# Allegro board HY_TPL5010_V10.brd
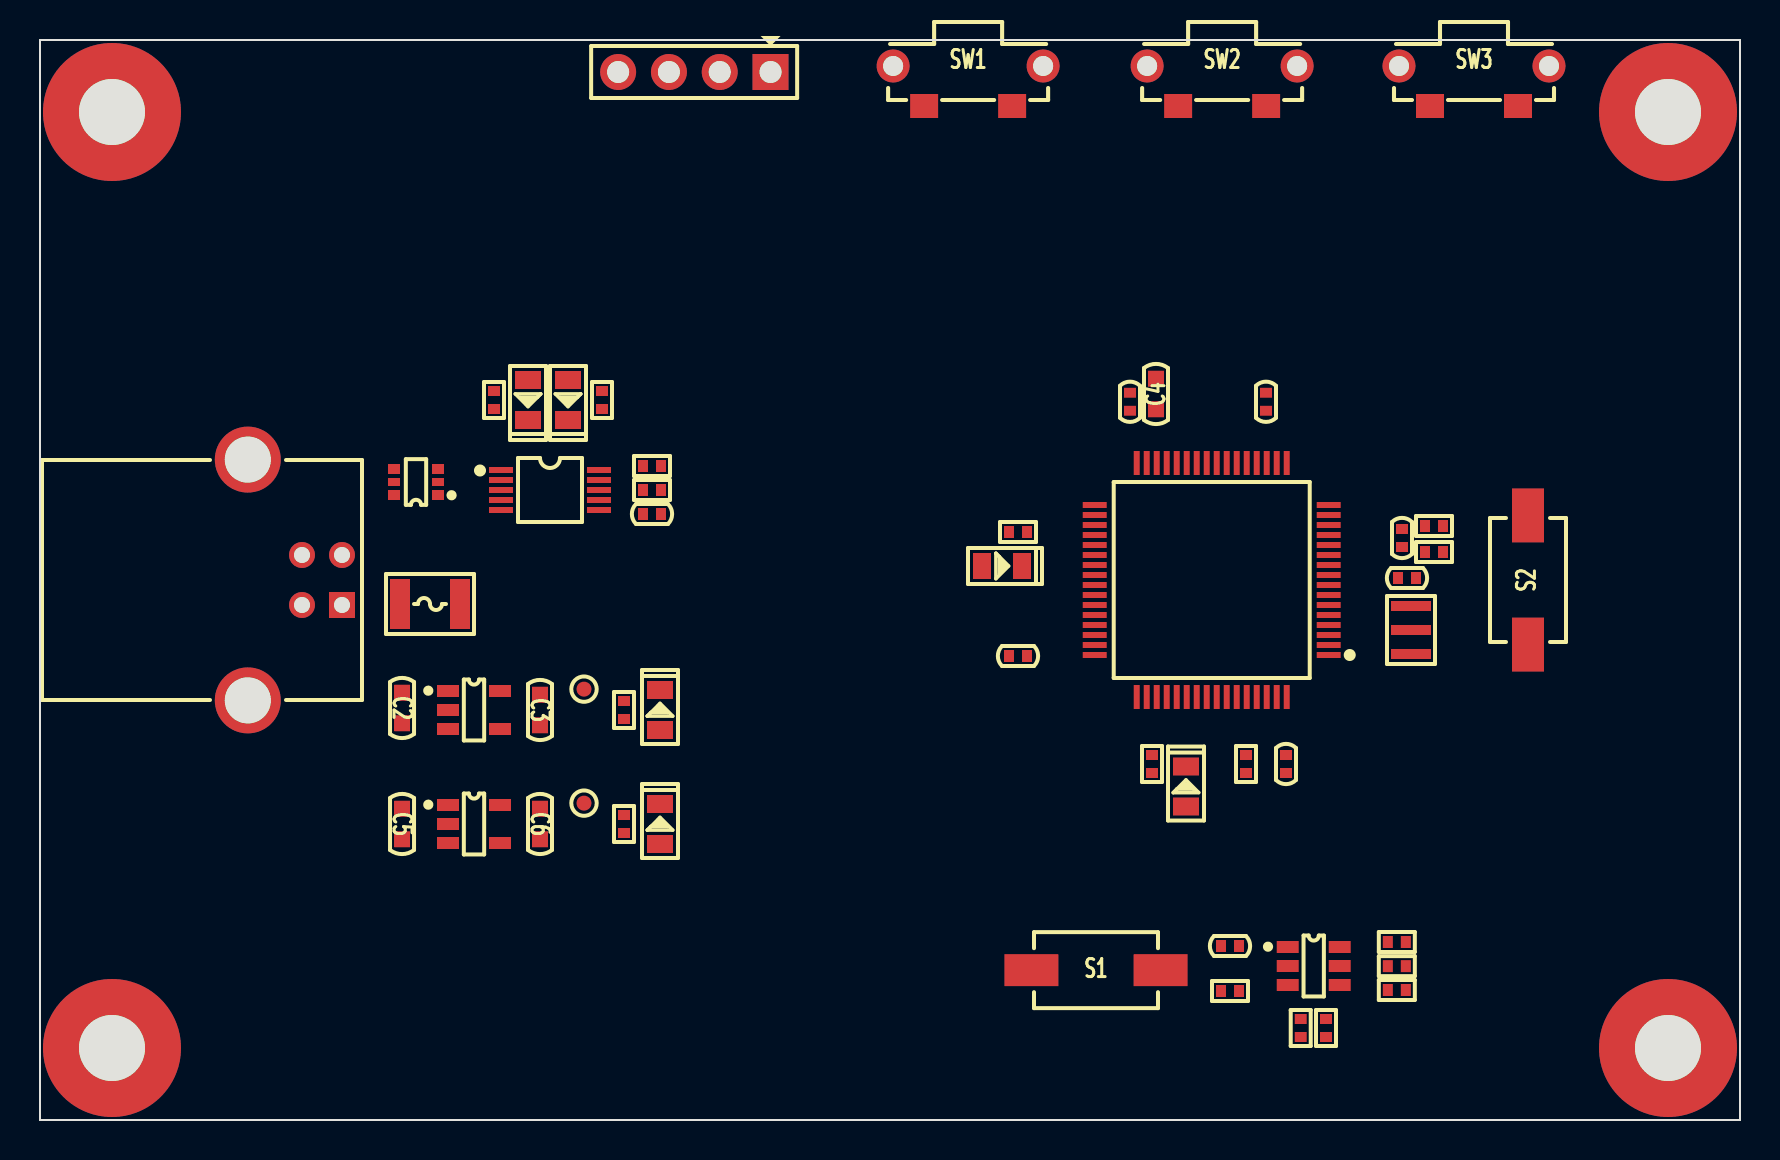
[diagram p0: board, top side]
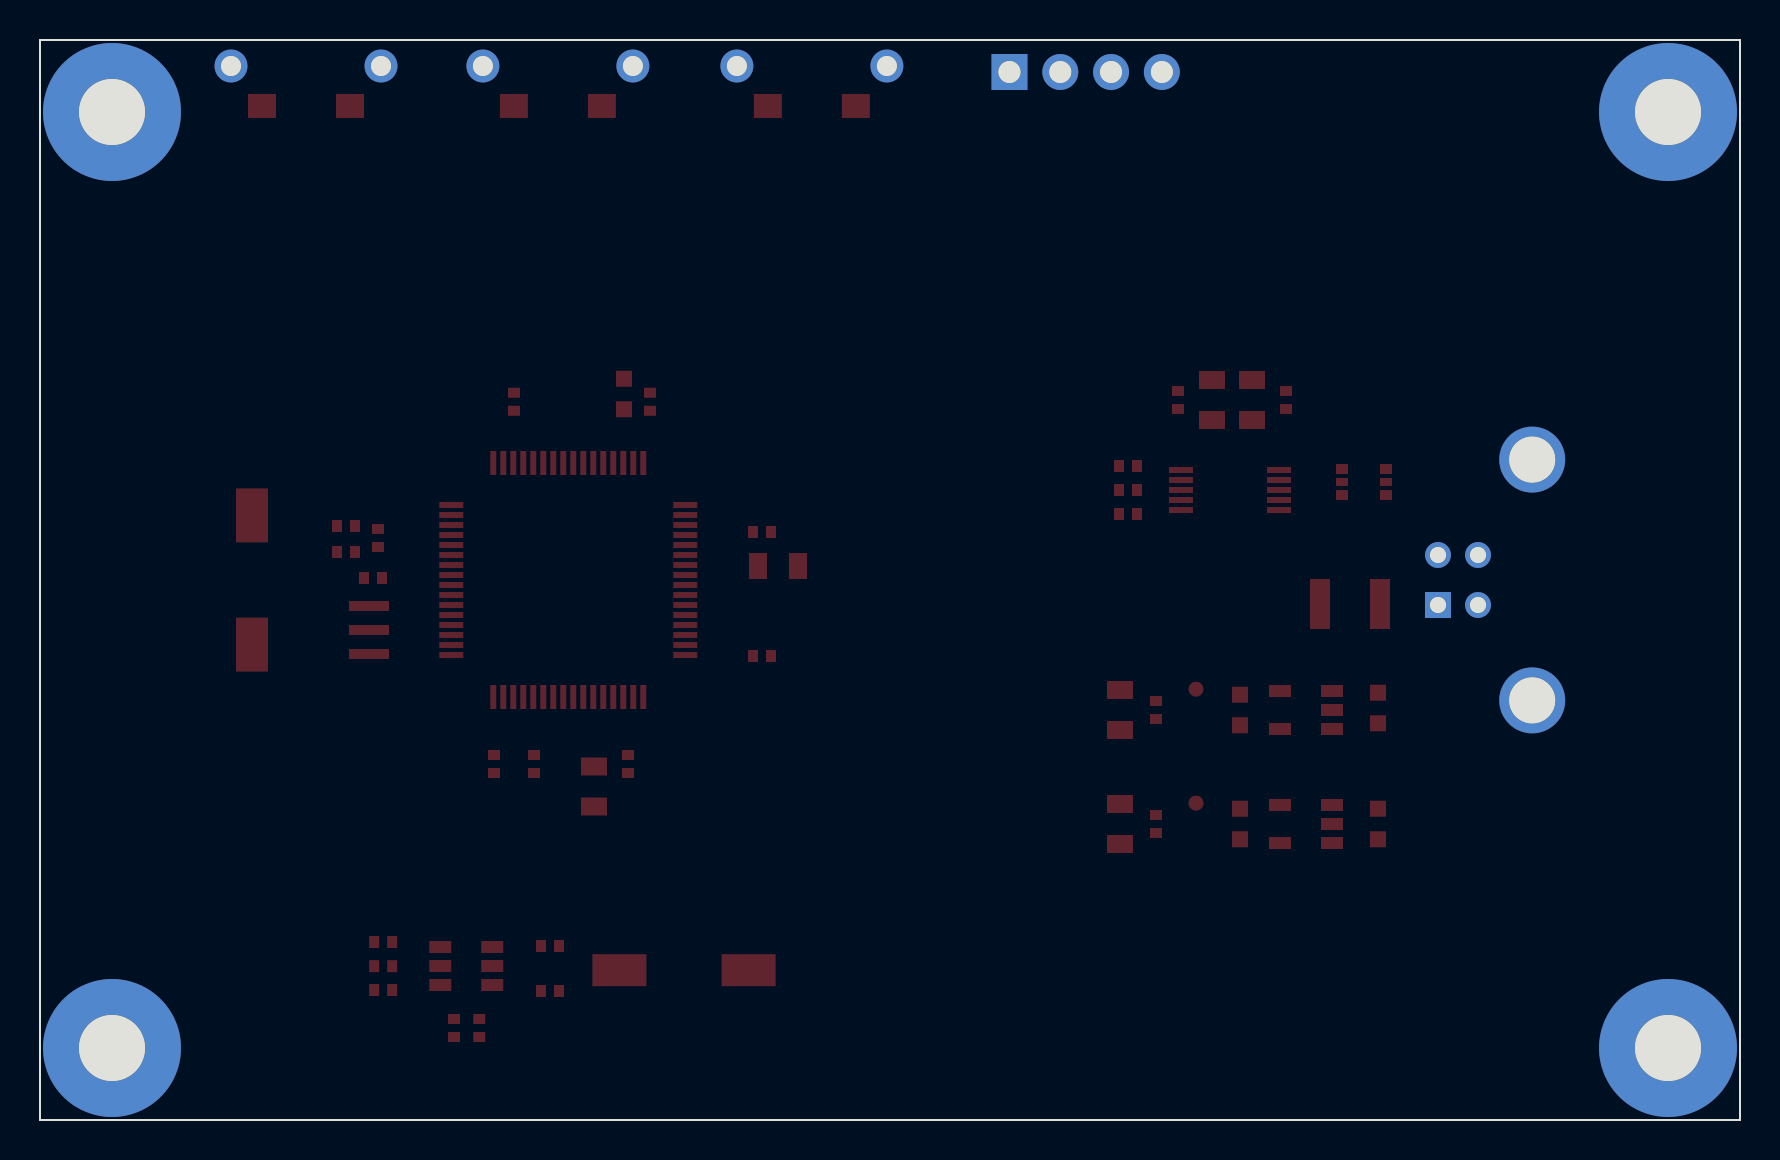
[diagram p1: board, bottom side, seen from below]

Outline 85 x 54 mm; copper layers: TOP, BOTTOM. Coordinates in mm from the lower left corner of the outline.
Outline path: 0,54 0,0 85,0 85,54 0,54

## Design rules (mm)
constraint set DEFAULT: min track width 0.203, pair gap 0.203
net group USB_D: nets USB_DM USB_DP

## Placement (name value [footprint] x y rotation side)
C1  100nF_50V  [C0402]  30.6 30.3 180 top
C2  10uF_10V  [C0603]  18.1 20.6 270 top
C3  10uF_10V  [C0603]  25 20.5 270 top
C4  10uF_10V  [C0603]  55.8 36.3 90 top
C5  10uF_10V  [C0603]  18.1 14.8 270 top
C6  10uF_10V  [C0603]  25 14.8 270 top
C7  100nF_50V  [C0402]  54.5 35.91 270 top
C8  100nF_50V  [C0402]  61.3 35.91 270 top
C9  100nF_50V  [C0402]  48.9 23.2 0 top
C10  100nF_50V  [C0402]  62.3 17.8 90 top
C11  100nF_50V  [C0402]  59.5 8.7 180 top
C12  100nF_50V  [C0402]  68.1 29.1 90 top
C13  100nF_50V  [C0402]  68.35 27.1 0 top
D1  RED_0805  [LED0805]  24.4 36 270 top
D2  RED_0805  [LED0805]  26.4 36 270 top
D3  RED_0805  [LED0805]  31 20.5 90 top
D4  RED_0805  [LED0805]  31 14.8 90 top
D5  RED_0805  [LED0805]  48.1 27.7 0 top
D6  RED_0805  [LED0805]  57.3 16.67 90 top
F1  SMD1210-200  [FUSE1210]  19.5 25.8 0 top
J1  -  [CN1X4-2P54-Z]  36.53 52.4 180 top
MH1  Hold/NI  [HOLD6R90X3R40]  3.6 3.6 0 top
MH2  Hold/NI  [HOLD6R90X3R40]  81.4 3.6 0 top
MH3  Hold/NI  [HOLD6R90X3R40]  81.4 50.4 0 top
MH4  Hold/NI  [HOLD6R90X3R40]  3.6 50.4 0 top
R1  4.7K  [R0402]  22.7 36 90 top
R2  4.7K  [R0402]  28.1 36 90 top
R3  1K  [R0402]  30.6 32.7 0 top
R4  1K  [R0402]  30.6 31.5 0 top
R5  4.7K  [R0402]  29.2 20.5 270 top
R6  4.7K  [R0402]  29.2 14.8 270 top
R7  0R  [R0402]  69.7 29.7 0 top
R8  100K  [R0402]  67.84 8.9 0 top
R9  1K  [R0402]  67.84 7.69 0 top
R10  0R  [R0402]  69.7 28.4 0 top
R11  100K  [R0402]  63.04 4.6 270 top
R12  100K  [R0402]  64.3 4.6 270 top
R13  22K  [R0402]  59.5 6.45 0 top
R14  1K  [R0402]  67.84 6.5 0 top
R15  10K  [R0402]  48.9 29.4 180 top
R16  10K  [R0402]  60.3 17.8 270 top
R17  10K  [R0402]  55.6 17.8 270 top
S1  3*6*2.5  [KEY-2P-SMD-6R2X3R8X2R5]  52.8 7.49 0 top
S2  3*6*2.5  [KEY-2P-SMD-6R2X3R8X2R5]  74.4 27 90 top
SW1  -  [K2-1112SW-A4SW-04]  46.41 52.4 0 top
SW2  -  [K2-1112SW-A4SW-04]  59.11 52.4 0 top
SW3  -  [K2-1112SW-A4SW-04]  71.7 52.4 0 top
TP1  TestPoint/NI  [TP-0R75]  27.2 21.54 0 top
TP2  TestPoint/NI  [TP-0R75]  27.2 15.84 0 top
U1  CH340E  [MSOP10]  25.5 31.5 270 top
U2  STM32F410RBT6  [LQFP64-10X10X0R5]  58.59 27 90 top
U3  TPD4E1U06DCKR  [SOT363]  18.8 31.9 90 top
U4  SPX3819M5-L-3-3/TR  [SOT23-5]  21.7 20.5 270 top
U5  SPX3819M5-L-3-3/TR  [SOT23-5]  21.7 14.8 270 top
U6  TPL5010DDCR  [SOT23-6]  63.69 7.7 270 top
USB1  -  [USB-B]  15.1 27 180 top
X1  CSTCE8M00G15C99-R0  [X-3P-3R2X1R3-SMD]  68.55 24.5 90 top

## Library data of the parts
C1-C12 = CAP NP_2
C13 = CAP NP
D1-D4 = LED_1
D5 D6 = LED_4
F1 = FUSE
J1 = CONN RCPT 4
MH1-MH4 = Hold_1
R1-R17 = R_Generic
S1 S2 = SW PUSHBUTTON_0
SW1-SW3 = SWITCH-SPST-4P
TP1 TP2 = TestPoint
U1 = CH340E
U2 = STM32F410RBT6
U3 = TPD4E1U06DBVR
U4 U5 = SPX3819M5-L-1-2
U6 = TPL5010DDCR
USB1 = USB-B
X1 = XTAL_5032_0

## Footprints (pads in the part's own frame, mm; a bottom-side part is the same pattern mirrored in y, then rotated)
C0402
  rect 0.5x0.6 smd: 1(-0.45,0) 2(0.45,0)
C0603
  rect 0.8x0.8 smd: 1(-0.762,0) 2(0.762,0)
CN1X4-2P54-Z
  rect 1.8x1.8 hole 1.1: 1(0,0)
  round 1.8 hole 1.1: 2(2.54,0) 3(5.08,0) 4(7.62,0)
FUSE1210
  rect 1x2.5 smd: 1(-1.5,0) 2(1.5,0)
HOLD6R90X3R40
  round 6.9 hole 3.3: 1(0,0)
K2-1112SW-A4SW-04
  round 1.65 hole 1: 1(-3.75,0.3) 4(3.75,0.3)
  rect 1.4x1.2 smd: 2(-2.2,-1.7) 3(2.2,-1.7)
KEY-2P-SMD-6R2X3R8X2R5
  rect 2.7x1.6 smd: 1(-3.23,0) 2(3.23,0)
LED0805
  rect 0.9x1.3 smd: 1(-1,0) 2(1,0)
LQFP64-10X10X0R5
  rect 0.3x1.2 smd: 1(-3.75,-5.85) 2(-3.25,-5.85) 3(-2.75,-5.85) 4(-2.25,-5.85) 5(-1.75,-5.85) 6(-1.25,-5.85) 7(-0.75,-5.85) 8(-0.25,-5.85) 9(0.25,-5.85) 10(0.75,-5.85) 11(1.25,-5.85) 12(1.75,-5.85) 13(2.25,-5.85) 14(2.75,-5.85) 15(3.25,-5.85) 16(3.75,-5.85) 33(3.75,5.85) 34(3.25,5.85) 35(2.75,5.85) 36(2.25,5.85) 37(1.75,5.85) 38(1.25,5.85) 39(0.75,5.85) 40(0.25,5.85) 41(-0.25,5.85) 42(-0.75,5.85) 43(-1.25,5.85) 44(-1.75,5.85) 45(-2.25,5.85) 46(-2.75,5.85) 47(-3.25,5.85) 48(-3.75,5.85)
  rect 1.2x0.3 smd: 17(5.85,-3.75) 18(5.85,-3.25) 19(5.85,-2.75) 20(5.85,-2.25) 21(5.85,-1.75) 22(5.85,-1.25) 23(5.85,-0.75) 24(5.85,-0.25) 25(5.85,0.25) 26(5.85,0.75) 27(5.85,1.25) 28(5.85,1.75) 29(5.85,2.25) 30(5.85,2.75) 31(5.85,3.25) 32(5.85,3.75) 49(-5.85,3.75) 50(-5.85,3.25) 51(-5.85,2.75) 52(-5.85,2.25) 53(-5.85,1.75) 54(-5.85,1.25) 55(-5.85,0.75) 56(-5.85,0.25) 57(-5.85,-0.25) 58(-5.85,-0.75) 59(-5.85,-1.25) 60(-5.85,-1.75) 61(-5.85,-2.25) 62(-5.85,-2.75) 63(-5.85,-3.25) 64(-5.85,-3.75)
MSOP10
  rect 0.3x1.2 smd: 1(-1,-2.45) 2(-0.5,-2.45) 3(0,-2.45) 4(0.5,-2.45) 5(1,-2.45) 6(1,2.45) 7(0.5,2.45) 8(0,2.45) 9(-0.5,2.45) 10(-1,2.45)
R0402
  rect 0.5x0.6 smd: 1(-0.45,0) 2(0.45,0)
SOT23-5
  rect 0.6x1.1 smd: 1(-0.95,-1.3) 2(0,-1.3) 3(0.95,-1.3) 4(0.95,1.3) 5(-0.95,1.3)
SOT23-6
  rect 0.6x1.1 smd: 1(-0.95,-1.3) 2(0,-1.3) 3(0.95,-1.3) 4(0.95,1.3) 5(0,1.3) 6(-0.95,1.3)
SOT363
  rect 0.5x0.6 smd: 1(-0.65,-1.1) 3(0.65,-1.1) 4(0.65,1.1) 6(-0.65,1.1)
  rect 0.4x0.6 smd: 2(0,-1.1) 5(0,1.1)
TP-0R75
  round 0.75 smd: 1(0,0)
USB-B
  rect 1.3x1.3 hole 0.8: 1(0,1.25)
  round 1.3 hole 0.8: 2(0,-1.25) 3(2,-1.25) 4(2,1.25)
  round 3.3 hole 2.3: 5(4.71,6.02) 6(4.71,-6.02)
X-3P-3R2X1R3-SMD
  rect 0.5x2 smd: 1(-1.2,0) 2(0,0) 3(1.2,0)

## Nets
GND: C1.1 C2.2 C3.2 C4.2 C5.2 C6.2 C7.1 C8.1 C9.1 C10.1 C11.2 C13.2 D3.2(CATHODE) D4.2(CATHODE) J1.1 MH1.1 MH2.1 MH3.1 MH4.1 R10.2 R11.2 R12.2 R13.2 R16.2 S2.1 SW1.1 SW1.4 SW2.1 SW2.2 SW2.4 SW3.1 SW3.2 SW3.4 U1.3 U2.18 U2.31 U2.47 U2.63(VSS_4) U3.2 U3.5(NC) U4.2 U5.2 U6.2 USB1.4 USB1.5 USB1.6 X1.2
VCC_3.3V: C6.1 C7.2 C8.2 C9.2 C10.2 J1.2 R1.1 R2.1 R6.1 R7.2 R15.1 R17.1 SW1.2 TP2.1 U2.1 U2.19 U2.32 U2.48 U2.64 U5.5(VOUT)
VCC_3.3V_WDG: C1.2 C3.1 C11.1 R5.1 R8.1 S1.1 TP1.1 U1.7(VCC) U1.10 U4.5(VOUT) U6.1
VCC_USB: F1.1 USB1.1(VBUS)
VCC_USB_5V: C2.1 C5.1 F1.2 U4.1 U4.3 U5.1
VDDA: C12.2 R7.1 U2.13
VSSA: C12.1 R10.1 U2.12
BOOT0: R16.1 U2.60
CH340E_RXD: D2.2(CATHODE) R3.1 U1.9
CH340E_TXD: D1.2(CATHODE) R4.1 U1.8
CTL_PWR: R8.2 U5.3 U6.6
DONE: R12.1 R14.1 U6.4
KEY0: SW2.3 U2.55
KEY1: SW3.3 U2.56
LED0: D5.2(CATHODE) U2.41
LED1: D6.2(CATHODE) U2.54
NRST: C13.1 S2.2 U2.7
OSC_IN: U2.5 X1.1
OSC_OUT: U2.6 X1.3
PA1: R9.2 U2.15
PA2: R14.2 U2.16
SWCLK: J1.3 U2.49
SWDIO: J1.4 U2.46
USART1_RX: R4.2 U2.43
USART1_TX: R3.2 U2.42
USB_DM: U1.2 U3.1 U3.6 USB1.2
USB_DP: U1.1 U3.3 U3.4 USB1.3
WAKE: R9.1 R11.1 U6.5(WAKE)
WK_UP: SW1.3 U2.57
N17433737: R13.1 S1.2 U6.3
N17438101: D5.1 R15.2
N17438131: D6.1 R17.2
N17440274: C4.1 U2.30
N174292921: D3.1 R5.2
N174302151: D4.1 R6.2
N174362731: D1.1 R1.2
N174362811: D2.1 R2.2

Pads without a net: U1 4 5 6; U2 2 3 4 8 9 10 11 14 17 20 21 22 23 24 25 26 27 28 29 33 34 35 36 37 38 39 40 44 45 50 51 52 53 58 59 61 62; U4 4; U5 4
